# Altium PCB PCB1.pcbdoc (part 3 of 4)
Units mil, origin at the board's own origin, x right, y up, seen from the top; angles counter-clockwise.
Board outline 3346.69 x 4227.01 mil, 4 copper layers (Top Layer, Inner1, Inner2, Bottom Layer); 103 components, 145 nets, 660 pads, 276 vias.
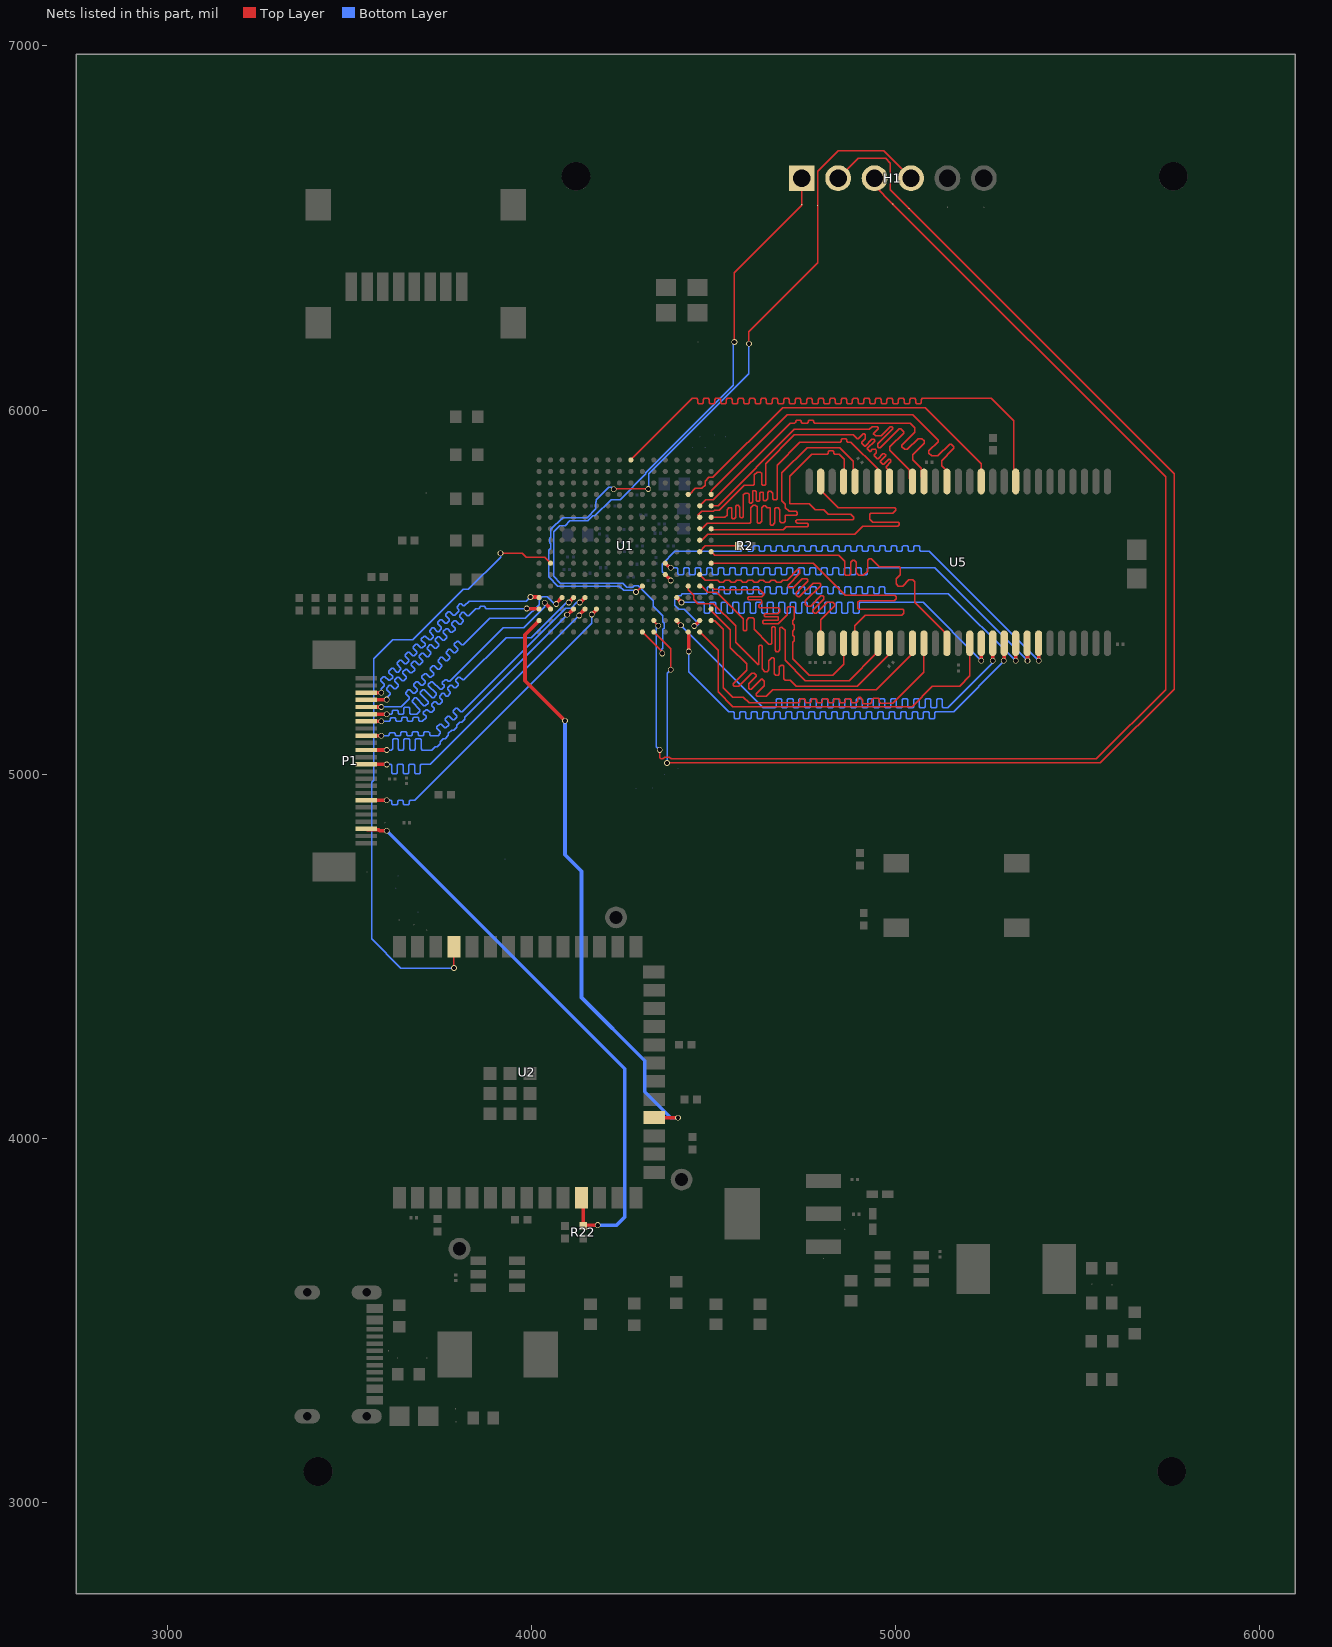
[diagram p5: the nets of this part, all layers, seen from the top]

## Via types
v1: diameter 15.75, hole 11.81, Top Layer to Bottom Layer, 260 vias
v2: diameter 24.02, hole 12.01, Top Layer to Bottom Layer, 16 vias

## Nets (pads, with @x,y where several pads share a name; then routed paths per layer and width w, separated by ;. In a path a pad name is that pad's centre, name@x,y a point inside that pad or via, vN(x,y) a via of type N, cw(c..) or ccw(c..) an arc to the next point about the centre after c; other vN are vias at no path point) (continued)
SD_A12: U1.A9 U5.36 | length 1784.5
  Top Layer w3.94: U1.A9@4272.76,5863.23 4441.54,6032.01 4453.35,6032.01 4456.13,6029.22 4456.13,6019.79 4458.92,6017.01 4469.1,6017.01 4471.88,6019.79 4471.88,6029.22 4474.66,6032.01 4484.85,6032.01 4487.63,6029.22 4487.63,6019.79 4490.41,6017.01 4500.59,6017.01 4503.38,6019.79 4503.38,6029.22 4506.16,6032.01 4516.34,6032.01 4519.12,6029.22 4519.12,6019.79 4521.91,6017.01 4532.09,6017.01 4534.87,6019.79 4534.87,6029.22 4537.66,6032.01 4547.84,6032.01 4550.62,6029.22 4550.62,6019.79 4553.4,6017.01 4563.59,6017.01 4566.37,6019.79 4566.37,6029.22 4569.15,6032.01 4579.33,6032.01 4582.12,6029.22 4582.12,6019.79 4584.9,6017.01 4595.08,6017.01 4597.87,6019.79 4597.87,6029.22 4600.65,6032.01 4610.83,6032.01 4613.61,6029.22 4613.61,6019.79 4616.4,6017.01 4626.58,6017.01 4629.36,6019.79 4629.36,6029.22 4632.15,6032.01 4642.33,6032.01 4645.11,6029.22 4645.11,6019.79 4647.89,6017.01 4658.07,6017.01 4660.86,6019.79 4660.86,6029.22 4663.64,6032.01 4673.82,6032.01 4676.61,6029.22 4676.61,6019.79 4679.39,6017.01 4689.57,6017.01 4692.35,6019.79 4692.35,6029.22 4695.14,6032.01 4705.32,6032.01 4708.1,6029.22 4708.1,6019.79 4710.89,6017.01 4721.07,6017.01 4723.85,6019.79 4723.85,6029.22 4726.63,6032.01 4736.81,6032.01 4739.6,6029.22 4739.6,6019.79 4742.38,6017.01 4752.56,6017.01 4755.35,6019.79 4755.35,6029.22 4758.13,6032.01 4768.31,6032.01 4771.09,6029.22 4771.09,6019.79 4773.88,6017.01 4784.06,6017.01 4786.84,6019.79 4786.84,6029.22 4789.63,6032.01 4799.81,6032.01 4802.59,6029.22 4802.59,6019.79 4805.37,6017.01 4815.55,6017.01 4818.34,6019.79 4818.34,6029.22 4821.12,6032.01 4831.3,6032.01 4834.09,6029.22 4834.09,6019.79 4836.87,6017.01 4847.05,6017.01 4849.83,6019.79 4849.83,6029.22 4852.62,6032.01 4862.8,6032.01 4865.58,6029.22 4865.58,6019.79 4868.37,6017.01 4878.55,6017.01 4881.33,6019.79 4881.33,6029.22 4884.11,6032.01 4894.29,6032.01 4897.08,6029.22 4897.08,6019.79 4899.86,6017.01 4910.04,6017.01 4912.83,6019.79 4912.83,6029.22 4915.61,6032.01 4925.79,6032.01 4928.57,6029.22 4928.57,6019.79 4931.36,6017.01 4941.54,6017.01 4944.32,6019.79 4944.32,6029.22 4947.11,6032.01 4957.29,6032.01 4960.07,6029.22 4960.07,6019.79 4962.85,6017.01 4973.03,6017.01 4975.82,6019.79 4975.82,6029.22 4978.6,6032.01 4988.78,6032.01 4991.57,6029.22 4991.57,6019.79 4994.35,6017.01 5004.53,6017.01 5007.31,6019.79 5007.31,6029.22 5010.1,6032.01 5020.28,6032.01 5023.06,6029.22 5023.06,6019.79 5025.85,6017.01 5036.03,6017.01 5038.81,6019.79 5038.81,6029.22 5041.59,6032.01 5051.77,6032.01 5054.56,6029.22 5054.56,6019.79 5057.34,6017.01 5067.52,6017.01 5070.31,6019.79 5070.31,6029.22 5073.09,6032.01 5262.01,6032.01 5323.81,5970.2 5323.81,5819.81 5324.49,5819.14 5324.49,5809.14 U5.36@5329.49,5804.14
SD_BA0: U1.K12 U5.20 | length 1708.5
  Top Layer w10: U1.K12@4367.25,5579.77 4380.07,5566.94 v1(4381.94,5566.94) ; U5.20@5360.99,5359.88 5362.01,5358.86 v1(5362.01,5312.01)
  Bottom Layer w3.94: v1(4381.94,5566.94) 4399.31,5566.94 4402.09,5564.16 4402.09,5550.16 4404.87,5547.37 4415.05,5547.37 4417.84,5550.16 4417.84,5564.16 4420.62,5566.94 4430.8,5566.94 4433.59,5564.16 4433.59,5550.16 4436.37,5547.37 4446.55,5547.37 4449.33,5550.16 4449.33,5564.16 4452.12,5566.94 4462.3,5566.94 4465.08,5564.16 4465.08,5550.16 4467.87,5547.37 4478.05,5547.37 4480.83,5550.16 4480.83,5564.16 4483.61,5566.94 4493.79,5566.94 4496.58,5564.16 4496.58,5550.16 4499.36,5547.37 4509.54,5547.37 4512.33,5550.16 4512.33,5564.16 4515.11,5566.94 4525.29,5566.94 4528.07,5564.16 4528.07,5550.16 4530.86,5547.37 4541.04,5547.37 4543.82,5550.16 4543.82,5564.16 4546.61,5566.94 4556.79,5566.94 4559.57,5564.16 4559.57,5550.16 4562.35,5547.37 4572.53,5547.37 4575.32,5550.16 4575.32,5564.16 4578.1,5566.94 4588.28,5566.94 4591.07,5564.16 4591.07,5550.16 4593.85,5547.37 4604.03,5547.37 4606.81,5550.16 4606.81,5564.16 4609.6,5566.94 4619.78,5566.94 4622.56,5564.16 4622.56,5550.16 4625.35,5547.37 4635.53,5547.37 4638.31,5550.16 4638.31,5564.16 4641.09,5566.94 4651.27,5566.94 4654.06,5564.16 4654.06,5550.16 4656.84,5547.37 4667.02,5547.37 4669.81,5550.16 4669.81,5564.16 4672.59,5566.94 4682.77,5566.94 4685.55,5564.16 4685.55,5550.16 4688.34,5547.37 4698.52,5547.37 4701.3,5550.16 4701.3,5564.16 4704.09,5566.94 4714.27,5566.94 4717.05,5564.16 4717.05,5550.16 4719.83,5547.37 4730.01,5547.37 4732.8,5550.16 4732.8,5564.16 4735.58,5566.94 4745.76,5566.94 4748.55,5564.16 4748.55,5550.16 4751.33,5547.37 4761.51,5547.37 4764.29,5550.16 4764.29,5564.16 4767.08,5566.94 4777.26,5566.94 4780.04,5564.16 4780.04,5550.16 4782.83,5547.37 4793.01,5547.37 4795.79,5550.16 4795.79,5564.16 4798.57,5566.94 4808.75,5566.94 4811.54,5564.16 4811.54,5550.16 4814.32,5547.37 4824.5,5547.37 4827.29,5550.16 4827.29,5564.16 4830.07,5566.94 4840.25,5566.94 4843.03,5564.16 4843.03,5550.16 4845.82,5547.37 4856,5547.37 4858.78,5550.16 4858.78,5564.16 4861.57,5566.94 4871.75,5566.94 4874.53,5564.16 4874.53,5550.16 4877.31,5547.37 4887.49,5547.37 4890.28,5550.16 4890.28,5564.16 4893.06,5566.94 4903.24,5566.94 4906.03,5564.16 4906.03,5550.16 4908.81,5547.37 4918.99,5547.37 4921.77,5550.16 4921.77,5564.16 4924.56,5566.94 5107.07,5566.94 v1(5362.01,5312.01)
SD_BA1: U1.L12 U5.21 | length 1673.6
  Top Layer w10: U1.L12@4367.25,5548.27 4382.01,5533.51 v1(4382.01,5532.01) ; v1(5392.48,5312.01) U5.21@5392.48,5359.88
  Bottom Layer w3.94: v1(4382.01,5532.01) 4358.24,5555.77 4358.24,5576.76 4393.49,5612.01 4574.9,5612.01 4577.68,5614.79 4577.68,5624.22 4580.46,5627.01 4590.64,5627.01 4593.43,5624.22 4593.43,5614.79 4596.21,5612.01 4606.39,5612.01 4609.18,5614.79 4609.18,5624.22 4611.96,5627.01 4622.14,5627.01 4624.92,5624.22 4624.92,5614.79 4627.71,5612.01 4637.89,5612.01 4640.67,5614.79 4640.67,5624.22 4643.46,5627.01 4653.64,5627.01 4656.42,5624.22 4656.42,5614.79 4659.2,5612.01 4669.38,5612.01 4672.17,5614.79 4672.17,5624.22 4674.95,5627.01 4685.13,5627.01 4687.92,5624.22 4687.92,5614.79 4690.7,5612.01 4700.88,5612.01 4703.66,5614.79 4703.66,5624.22 4706.45,5627.01 4716.63,5627.01 4719.41,5624.22 4719.41,5614.79 4722.2,5612.01 4732.38,5612.01 4735.16,5614.79 4735.16,5624.22 4737.94,5627.01 4748.12,5627.01 4750.91,5624.22 4750.91,5614.79 4753.69,5612.01 4763.87,5612.01 4766.66,5614.79 4766.66,5624.22 4769.44,5627.01 4779.62,5627.01 4782.4,5624.22 4782.4,5614.79 4785.19,5612.01 4795.37,5612.01 4798.15,5614.79 4798.15,5624.22 4800.94,5627.01 4811.12,5627.01 4813.9,5624.22 4813.9,5614.79 4816.68,5612.01 4826.86,5612.01 4829.65,5614.79 4829.65,5624.22 4832.43,5627.01 4842.61,5627.01 4845.4,5624.22 4845.4,5614.79 4848.18,5612.01 4858.36,5612.01 4861.14,5614.79 4861.14,5624.22 4863.93,5627.01 4874.11,5627.01 4876.89,5624.22 4876.89,5614.79 4879.68,5612.01 4889.86,5612.01 4892.64,5614.79 4892.64,5624.22 4895.42,5627.01 4905.6,5627.01 4908.39,5624.22 4908.39,5614.79 4911.17,5612.01 4921.35,5612.01 4924.14,5614.79 4924.14,5624.22 4926.92,5627.01 4937.1,5627.01 4939.88,5624.22 4939.88,5614.79 4942.67,5612.01 4952.85,5612.01 4955.63,5614.79 4955.63,5624.22 4958.42,5627.01 4968.6,5627.01 4971.38,5624.22 4971.38,5614.79 4974.16,5612.01 4984.34,5612.01 4987.13,5614.79 4987.13,5624.22 4989.91,5627.01 5000.09,5627.01 5002.88,5624.22 5002.88,5614.79 5005.66,5612.01 5015.84,5612.01 5018.62,5614.79 5018.62,5624.22 5021.41,5627.01 5031.59,5627.01 5034.37,5624.22 5034.37,5614.79 5037.16,5612.01 5047.34,5612.01 5050.12,5614.79 5050.12,5624.22 5052.9,5627.01 5063.08,5627.01 5065.87,5624.22 5065.87,5614.79 5068.65,5612.01 5092.48,5612.01 v1(5392.48,5312.01)
SD_CAS_N: U1.R13 U5.17 | length 1697.4
  Top Layer w10: U1.R13@4398.74,5422.29 4398.74,5420.41 v1(4410.1,5409.05) ; v1(5266.5,5312.01) U5.17@5266.5,5359.88
  Bottom Layer w3.94: v1(4410.1,5409.05) 4636.23,5182.91 4668.5,5182.91 4671.29,5185.7 4671.29,5204.22 4674.07,5207.01 4684.25,5207.01 4687.03,5204.22 4687.03,5185.7 4689.82,5182.91 4700,5182.91 4702.78,5185.7 4702.78,5204.22 4705.57,5207.01 4715.75,5207.01 4718.53,5204.22 4718.53,5185.7 4721.31,5182.91 4731.49,5182.91 4734.28,5185.7 4734.28,5204.22 4737.06,5207.01 4747.24,5207.01 4750.03,5204.22 4750.03,5185.7 4752.81,5182.91 4762.99,5182.91 4765.77,5185.7 4765.77,5204.22 4768.56,5207.01 4778.74,5207.01 4781.52,5204.22 4781.52,5185.7 4784.31,5182.91 4794.49,5182.91 4797.27,5185.7 4797.27,5204.22 4800.05,5207.01 4810.23,5207.01 4813.02,5204.22 4813.02,5185.7 4815.8,5182.91 4825.98,5182.91 4828.77,5185.7 4828.77,5204.22 4831.55,5207.01 4841.73,5207.01 4844.51,5204.22 4844.51,5185.7 4847.3,5182.91 4857.48,5182.91 4860.26,5185.7 4860.26,5204.22 4863.05,5207.01 4873.23,5207.01 4876.01,5204.22 4876.01,5185.7 4878.79,5182.91 4888.97,5182.91 4891.76,5185.7 4891.76,5204.22 4894.54,5207.01 4904.72,5207.01 4907.51,5204.22 4907.51,5185.7 4910.29,5182.91 4920.47,5182.91 4923.25,5185.7 4923.25,5204.22 4926.04,5207.01 4936.22,5207.01 4939,5204.22 4939,5185.7 4941.79,5182.91 4951.97,5182.91 4954.75,5185.7 4954.75,5204.22 4957.53,5207.01 4967.71,5207.01 4970.5,5204.22 4970.5,5185.7 4973.28,5182.91 4983.46,5182.91 4986.25,5185.7 4986.25,5204.22 4989.03,5207.01 4999.21,5207.01 5001.99,5204.22 5001.99,5185.7 5004.78,5182.91 5014.96,5182.91 5017.74,5185.7 5017.74,5204.22 5020.53,5207.01 5030.71,5207.01 5033.49,5204.22 5033.49,5185.7 5036.27,5182.91 5046.45,5182.91 5049.24,5185.7 5049.24,5204.22 5052.02,5207.01 5062.2,5207.01 5064.99,5204.22 5064.99,5185.7 5067.77,5182.91 5077.95,5182.91 5080.73,5185.7 5080.73,5204.22 5083.52,5207.01 5093.7,5207.01 5096.48,5204.22 5096.48,5185.7 5099.27,5182.91 5109.45,5182.91 5112.23,5185.7 5112.23,5204.22 5115.01,5207.01 5125.19,5207.01 5127.98,5204.22 5127.98,5185.7 5130.76,5182.91 5142.57,5182.91 5266.5,5306.84 v1(5266.5,5312.01)
SD_CLK: R2.2 U1.J15 | length 114.8
  Top Layer w3.94: U1.J15@4461.73,5611.26 4477.48,5627.01 R2.2@4569.97,5627.01
SD_CS_N: U1.R15 U5.19 | length 1693.9
  Top Layer w10: v1(4447.01,5407.01) 4461.73,5421.73 U1.R15@4461.73,5422.29 ; v1(5329.49,5312.01) U5.19@5329.49,5359.88
  Bottom Layer w3.94: v1(4447.01,5407.01) 4452.01,5407.01 4458.67,5413.67 4419.2,5453.15 4404.2,5453.15 4393.15,5464.2 4393.15,5479.82 4404.2,5490.87 4409.2,5490.87 4414.2,5495.87 4479.56,5495.87 4482.34,5498.65 4482.34,5511.62 4485.12,5514.41 4495.3,5514.41 4498.09,5511.62 4498.09,5498.65 4500.87,5495.87 4511.05,5495.87 4513.84,5498.65 4513.84,5511.62 4516.62,5514.41 4526.8,5514.41 4529.58,5511.62 4529.58,5498.65 4532.37,5495.87 4542.55,5495.87 4545.33,5498.65 4545.33,5511.62 4548.12,5514.41 4558.3,5514.41 4561.08,5511.62 4561.08,5498.65 4563.86,5495.87 4574.04,5495.87 4576.83,5498.65 4576.83,5511.62 4579.61,5514.41 4589.79,5514.41 4592.58,5511.62 4592.58,5498.65 4595.36,5495.87 4605.54,5495.87 4608.32,5498.65 4608.32,5511.62 4611.11,5514.41 4621.29,5514.41 4624.07,5511.62 4624.07,5498.65 4626.86,5495.87 4637.04,5495.87 4639.82,5498.65 4639.82,5511.62 4642.6,5514.41 4652.78,5514.41 4655.57,5511.62 4655.57,5498.65 4658.35,5495.87 4668.53,5495.87 4671.32,5498.65 4671.32,5511.62 4674.1,5514.41 4684.28,5514.41 4687.06,5511.62 4687.06,5498.65 4689.85,5495.87 4700.03,5495.87 4702.81,5498.65 4702.81,5511.62 4705.6,5514.41 4715.78,5514.41 4718.56,5511.62 4718.56,5498.65 4721.34,5495.87 4731.52,5495.87 4734.31,5498.65 4734.31,5511.62 4737.09,5514.41 4747.27,5514.41 4750.06,5511.62 4750.06,5498.65 4752.84,5495.87 4763.02,5495.87 4765.8,5498.65 4765.8,5511.62 4768.59,5514.41 4778.77,5514.41 4781.55,5511.62 4781.55,5498.65 4784.34,5495.87 4794.52,5495.87 4797.3,5498.65 4797.3,5511.62 4800.08,5514.41 4810.26,5514.41 4813.05,5511.62 4813.05,5498.65 4815.83,5495.87 4826.01,5495.87 4828.8,5498.65 4828.8,5511.62 4831.58,5514.41 4841.76,5514.41 4844.54,5511.62 4844.54,5498.65 4847.33,5495.87 4857.51,5495.87 4860.29,5498.65 4860.29,5511.62 4863.08,5514.41 4873.26,5514.41 4876.04,5511.62 4876.04,5498.65 4878.82,5495.87 4889,5495.87 4891.79,5498.65 4891.79,5511.62 4894.57,5514.41 4904.75,5514.41 4907.54,5511.62 4907.54,5498.65 4910.32,5495.87 4920.5,5495.87 4923.28,5498.65 4923.28,5511.62 4926.07,5514.41 4936.25,5514.41 4939.03,5511.62 4939.03,5498.65 4941.82,5495.87 4952,5495.87 4954.78,5498.65 4954.78,5511.62 4957.56,5514.41 4967.74,5514.41 4970.53,5511.62 4970.53,5498.65 4973.31,5495.87 5144.82,5495.87 5323.68,5317.01 5324.49,5317.01 v1(5329.49,5312.01)
SD_DQ0: U1.L15 U5.2 | length 983.7
  Top Layer w3.94: U1.L15@4461.73,5548.27 4476.77,5533.23 4510.9,5533.23 4513.68,5530.44 4513.68,5529.79 4516.47,5527.01 4526.65,5527.01 4529.43,5529.79 4529.43,5530.44 4532.22,5533.23 4542.4,5533.23 4545.18,5530.44 4545.18,5529.79 4547.96,5527.01 4558.14,5527.01 4560.93,5529.79 4560.93,5530.44 4563.71,5533.23 4573.89,5533.23 4576.68,5530.44 4576.68,5529.79 4579.46,5527.01 4589.64,5527.01 4592.42,5529.79 4592.42,5530.44 4595.21,5533.23 4605.39,5533.23 4608.17,5530.44 4608.17,5529.79 4610.96,5527.01 4621.14,5527.01 4623.92,5529.79 4623.92,5530.44 4626.7,5533.23 4636.88,5533.23 4639.67,5530.44 4639.67,5529.79 4642.45,5527.01 4652.63,5527.01 4655.42,5529.79 4655.42,5530.44 4658.2,5533.23 4668.38,5533.23 4671.16,5530.44 4671.16,5529.79 4673.95,5527.01 4684.13,5527.01 4686.91,5529.79 4686.91,5530.44 4689.7,5533.23 4701.51,5533.23 4731.44,5563.16 4735.85,5563.16 4737.01,5562.01 4737.01,5552.01 4704.61,5519.61 4704.61,5514.41 4707.01,5512.01 4718.85,5512.01 4743.85,5537.01 4756.04,5537.01 4758.82,5534.22 4758.82,5530.29 4727.01,5498.47 4727.01,5492.01 4732.01,5487.01 4735.57,5487.01 4773.36,5524.79 4791.27,5524.79 4794.06,5522.01 4794.06,5518.3 4752.01,5476.25 4752.01,5467.01 4757.01,5462.01 4767.01,5462.01 4794.79,5489.79 4799.22,5489.79 4802.01,5487.01 4802.01,5481.01 4772.01,5451.01 4772.01,5447.01 4777.01,5442.01 4782.01,5442.01 4812.01,5472.01 4827.67,5472.01 4832.42,5467.26 4832.42,5463.32 4794.06,5424.96 U5.2@4794.06,5364.88
SD_DQ1: U1.M16 U5.4 | length 983
  Top Layer w3.94: U1.M16@4493.23,5516.77 4501.73,5508.27 4511.99,5508.27 4513.49,5506.77 4627.25,5506.77 4639.11,5494.91 4632.36,5488.16 4597.01,5488.16 4594.22,5485.37 4594.22,5481.44 4597.01,5478.65 4630.36,5478.65 4632.01,5477.01 4632.01,5471.55 4624.22,5463.77 4624.22,5459.83 4627.01,5457.05 4676.97,5457.05 4681.19,5452.83 4681.19,5446.19 4676.19,5441.19 4642.01,5441.19 4639.45,5438.63 4639.45,5435.02 4642.01,5432.46 4676.97,5432.46 4676.97,5423.25 4676.29,5422.57 4637.01,5422.57 4634.22,5419.79 4634.22,5415.85 4637.01,5413.07 4676.97,5413.07 4702.01,5438.11 4702.01,5457.01 4704.79,5459.79 4719.22,5459.79 4722.01,5457.01 4722.01,5427.01 4717.01,5422.01 4717.01,5413.98 4721.74,5409.25 4721.74,5398.23 4717.01,5393.5 4717.01,5382.48 4721.74,5377.75 4721.74,5366.73 4717.01,5362.01 4717.01,5317.01 4762.01,5272.01 4827.01,5272.01 4857.05,5302.05 U5.4@4857.05,5364.88
SD_DQ2: U1.K16 U5.5 | length 1006.3
  Top Layer w3.94: U1.K16@4493.23,5579.77 4774.25,5579.77 4862.01,5492.01 4997.01,5492.01 5002.01,5487.01 5002.01,5482.01 4996.36,5476.36 4900.65,5476.36 4896.3,5472.01 4896.3,5456.08 4898.65,5453.73 5019.22,5453.73 5022.01,5450.94 5022.01,5442.01 5017.05,5437.05 4917.05,5437.05 4887.87,5407.87 4887.87,5375.55 4888.55,5374.88 U5.5@4888.55,5364.88
SD_DQ3: U1.M15 U5.7 | length 978.3
  Top Layer w3.94: U1.M15@4461.73,5516.77 4464.87,5516.77 4465.45,5516.18 4467.31,5516.18 4483.18,5500.32 4508.7,5500.32 4581.4,5427.61 4581.4,5397.01 4584.19,5394.22 4588.12,5394.22 4590.91,5397.01 4590.91,5423.65 4597.01,5429.75 4607.01,5429.75 4610.94,5425.81 4610.94,5398.07 4652.01,5357.01 4657.01,5357.01 4659.28,5359.28 4659.28,5402.01 4662.07,5404.79 4666.01,5404.79 4668.79,5402.01 4668.79,5340.23 4672.01,5337.01 4677.01,5337.01 4681.88,5341.88 4681.88,5402.01 4684.2,5404.33 4687.48,5404.33 4696.23,5395.57 4696.23,5312.78 4752.01,5257.01 4872.21,5257.01 4945.86,5330.66 4945.86,5354.2 4946.54,5354.88 4946.54,5359.88 U5.7@4951.54,5364.88
SD_DQ4: U1.M14 U5.8 | length 1016.4
  Top Layer w3.94: U1.M14@4430.24,5516.77 4430.24,5506.55 4445.28,5491.51 4445.28,5480.46 4456.92,5468.82 4499.46,5468.82 4560.96,5407.32 4560.96,5362.01 4622.28,5300.68 4623.54,5301.94 4623.54,5352.01 4626.33,5354.79 4630.26,5354.79 4633.05,5352.01 4633.05,5289.92 4640.96,5282.01 4647.01,5282.01 4651.69,5286.69 4651.69,5311.2 4660.29,5319.79 4664.22,5319.79 4667.01,5317.01 4667.01,5275.94 4670.94,5272.01 4677.01,5272.01 4680.64,5275.64 4680.64,5295.14 4685.29,5299.79 4689.22,5299.79 4692.01,5297.01 4692.01,5262.89 4697.01,5257.89 4710.39,5257.89 4726.27,5242.01 4894.42,5242.01 4989.21,5336.79 4989.21,5358.69 U5.8@4983.03,5364.88
SD_DQ5: U1.P16 U5.10 | length 1006.4
  Top Layer w3.94: U1.P16@4493.23,5453.78 4493.23,5449.49 4546.2,5396.52 4546.2,5347.82 4590.82,5303.2 4590.82,5285.32 4554.22,5248.73 4554.22,5244.79 4557.01,5242.01 4569.61,5242.01 4604.61,5277.01 4612.01,5277.01 4617.01,5272.01 4617.01,5269.41 4596.51,5248.92 4596.51,5236.51 4599.3,5233.73 4603.23,5233.73 4631.76,5262.25 4638.41,5255.61 4638.41,5242.91 4616.73,5221.23 4616.73,5217.29 4619.51,5214.5 4644.5,5214.5 4662.01,5232.01 4946.7,5232.01 5046.03,5331.33 U5.10@5046.03,5364.88
SD_DQ6: U1.R16 U5.11 | length 990.6
  Top Layer w3.94: U1.R16@4493.23,5422.29 4503.62,5422.29 4527.01,5398.9 4527.01,5237.01 4551.87,5212.15 4581.87,5212.15 4597.64,5196.37 4733.13,5196.37 4735.92,5199.16 4735.92,5204.22 4738.7,5207.01 4748.88,5207.01 4751.67,5204.22 4751.67,5199.16 4754.45,5196.37 4764.63,5196.37 4767.41,5199.16 4767.41,5204.22 4770.2,5207.01 4780.38,5207.01 4783.16,5204.22 4783.16,5199.16 4785.95,5196.37 4796.13,5196.37 4798.91,5199.16 4798.91,5204.22 4801.69,5207.01 4811.88,5207.01 4814.66,5204.22 4814.66,5199.16 4817.44,5196.37 4827.62,5196.37 4830.41,5199.16 4830.41,5204.22 4833.19,5207.01 4843.37,5207.01 4846.15,5204.22 4846.15,5199.16 4848.94,5196.37 4859.12,5196.37 4861.9,5199.16 4861.9,5204.22 4864.69,5207.01 4874.87,5207.01 4877.65,5204.22 4877.65,5199.16 4880.43,5196.37 4891.35,5196.37 4895.29,5200.31 4895.29,5209.22 4898.07,5212.01 4902.01,5212.01 4910.13,5203.89 4910.13,5194.01 4930.29,5194.01 4934.22,5197.94 4934.22,5204.22 4939.22,5209.22 4952.01,5209.22 4954.79,5206.44 4954.79,5199.12 4958.73,5195.18 4991.45,5195.18 5077.01,5280.73 U5.11@5077.01,5345
SD_DQ7: U1.J16 U5.13 | length 993.5
  Top Layer w3.94: U1.J16@4493.23,5611.26 4502.48,5602.01 4843.09,5602.01 4860.29,5584.79 4860.29,5549.29 4863.07,5546.51 4872.57,5546.51 4876.51,5550.45 4876.51,5582.01 4881.88,5587.38 4886.64,5587.38 4892.08,5581.94 4892.08,5553 4898.57,5546.51 4911.51,5546.51 4922.64,5557.64 4922.64,5587.64 4927.01,5592.01 4932.64,5592.01 4955.01,5569.65 4955.15,5569.79 5009.22,5569.79 5012.01,5567.01 5012.01,5547.37 5002.01,5537.37 5002.01,5522.64 5007.64,5517.01 5019.32,5517.01 5036.47,5534.16 5047.01,5534.16 5052.1,5529.06 5052.1,5472.58 ; 5052.09,5472.57 5140.51,5384.14 U5.13@5140.51,5364.88
SD_DQ8: U1.D16 U5.42 | length 993.1
  Top Layer w3.94: U1.D16@4493.23,5768.74 4493.23,5778.74 4701.5,5987.01 5047.01,5987.01 5117.01,5917.01 5117.01,5913.82 5091.19,5888 5091.19,5882.01 5098.57,5874.63 5115.69,5874.63 5148.07,5907.01 5152.01,5907.01 5159.79,5899.22 5159.79,5894.79 5157.01,5892.01 5156.77,5892.01 5126.19,5861.43 5126.19,5847.01 5135.51,5837.69 5135.51,5814.14 U5.42@5140.51,5809.14
SD_DQ9: U1.E15 U5.44 | length 985.5
  Top Layer w3.94: U1.E15@4461.73,5737.25 4478.18,5753.7 4499.46,5753.7 4710.27,5964.51 4722.08,5964.51 4724.86,5967.29 4724.86,5969.22 4727.65,5972.01 4737.83,5972.01 4740.61,5969.22 4740.61,5967.29 4743.39,5964.51 4756.98,5964.51 4759.77,5967.29 4759.77,5969.22 4762.55,5972.01 4772.73,5972.01 4775.51,5969.22 4775.51,5967.29 4778.3,5964.51 5039.51,5964.51 5052.01,5952.01 5052.01,5938.66 5017.01,5903.66 5017.01,5899.4 5024.4,5892.01 5032.01,5892.01 5062.01,5922.01 5072.01,5922.01 5078.68,5915.34 5078.68,5909.77 5047.01,5878.1 5047.01,5863.2 5070.02,5840.19 5070.02,5816.64 U5.44@5077.52,5809.14
SD_DQ10: U1.E16 U5.45 | length 982.3
  Top Layer w3.94: U1.E16@4493.23,5737.25 4512.25,5737.25 4722.01,5947.01 4927.41,5947.01 4935.2,5954.79 4949.22,5954.79 4952.01,5952.01 4952.01,5948.62 4938.9,5935.52 4945.13,5929.29 4959.79,5929.29 4985.29,5954.79 4989.22,5954.79 4992.01,5952.01 4992.01,5949.39 4950.82,5908.2 4950.82,5899.26 4953.6,5896.48 4957.54,5896.48 5010.04,5948.98 5013.98,5948.98 5022.01,5940.94 5022.01,5937.01 4984.18,5899.18 4984.18,5890.24 5032.32,5842.1 5032.32,5841.9 5037.6,5836.62 5037.6,5813.08 5041.54,5809.14 U5.45@5046.03,5809.14
SD_DQ11: U1.F15 U5.47 | length 987.3
  Top Layer w3.94: U1.F15@4461.73,5705.75 4456.73,5710.75 4456.73,5711.73 4467.21,5722.21 4499.46,5722.21 4503.04,5725.79 4515.79,5725.79 4584.22,5794.22 4609.22,5794.22 4612.01,5797.01 4612.01,5822.01 4620.02,5830.02 4628.07,5830.02 4632.01,5826.08 4632.01,5797.01 4634.79,5794.22 4640.67,5794.22 4643.45,5797.01 4643.45,5853.45 4722.01,5932.01 4883.71,5932.01 4893.94,5921.78 4897.27,5921.78 4910.29,5934.79 4914.22,5934.79 4917.01,5932.01 4917.01,5922.01 4907.01,5912.01 4907.01,5908.71 4914.32,5901.4 4916.4,5901.4 4934.79,5919.79 4939.22,5919.79 4942.01,5917.01 4942.01,5915.26 4922.01,5895.26 4922.01,5893.71 4929.86,5885.86 4936.02,5892.01 4944.52,5892.01 4947.01,5889.52 4947.01,5883.24 4940.78,5877.01 4940.78,5874.94 4948.71,5867.01 4952.01,5867.01 4964.79,5879.79 4969.22,5879.79 4972.01,5877.01 4972.01,5875.09 4957.01,5860.09 4957.01,5858.71 4964.69,5851.03 4966.52,5851.03 4980.29,5864.79 4984.22,5864.79 4987.01,5862.01 4987.01,5858.14 4973.71,5844.84 4973.71,5842.01 4983.03,5832.69 U5.47@4983.03,5809.14
SD_DQ12: U1.F16 U5.48 | length 986.3
  Top Layer w3.94: U1.F16@4493.23,5705.75 4530.75,5705.75 4537.01,5712.01 4537.01,5727.01 4542.01,5732.01 4548.57,5732.01 4550.29,5730.29 4550.29,5704.79 4553.07,5702.01 4557.01,5702.01 4561.28,5706.28 4561.28,5736.28 4563.55,5738.55 4567.01,5738.55 4572.33,5733.23 4572.33,5707.18 4575.29,5704.22 4579.22,5704.22 4582.01,5707.01 4582.01,5767.01 4587.01,5772.01 4594.35,5772.01 4597.5,5768.85 4597.5,5747.01 4600.29,5744.22 4602.98,5744.22 4607.01,5748.25 4607.01,5776.83 4609.47,5779.3 4614.72,5779.3 4617.5,5776.51 4617.5,5752.01 4620.29,5749.22 4624.22,5749.22 4627.01,5752.01 4627.01,5772.01 4629.54,5774.54 4634.48,5774.54 4635.87,5773.15 4635.87,5754.21 4638.65,5751.43 4642.59,5751.43 4648.17,5757.01 4648.17,5773.17 4652.01,5777.01 4657.01,5777.01 4662.01,5772.01 4662.01,5757.01 4664.79,5754.22 4671.43,5754.22 4674.22,5757.01 4674.22,5849.22 4737.01,5912.01 4847.58,5912.01 4850.37,5914.79 4850.37,5919.22 4853.15,5922.01 4863.33,5922.01 4866.12,5919.22 4866.12,5914.79 4868.9,5912.01 4877.01,5912.01 4949.23,5839.78 4949.23,5813.08 4951.54,5810.77 U5.48@4951.54,5809.14
SD_DQ13: U1.G15 U5.50 | length 986.5
  Top Layer w3.94: U1.G15@4461.73,5674.25 4467.29,5674.25 4482.33,5689.29 4599.29,5689.29 4602.01,5692.01 4602.01,5732.01 4609.22,5739.22 4614.79,5739.22 4619.79,5734.22 4619.79,5692.01 4622.58,5689.22 4626.51,5689.22 4632.01,5694.72 4632.01,5732.01 4637.01,5737.01 4642.01,5737.01 4647.01,5732.01 4655.53,5732.01 4655.53,5687.01 4658.31,5684.22 4662.25,5684.22 4668.52,5690.5 4668.52,5729.78 4670.75,5732.01 4677.01,5732.01 4682.01,5727.01 4682.01,5694.88 4685.94,5690.94 4693.07,5690.94 4697.01,5694.88 4697.01,5710.37 4698.65,5712.01 4727.01,5712.01 4729.79,5714.79 4729.79,5718.73 4726.7,5721.82 4707.2,5721.82 4697.01,5732.01 4697.01,5741.51 4687.47,5751.05 4687.47,5827.7 4756.77,5897.01 4847.01,5897.01 4883.88,5860.13 4883.88,5813.8 U5.50@4888.55,5809.14
SD_DQ14: U1.G16 U5.51 | length 983.1
  Top Layer w3.94: U1.G16@4493.23,5674.25 4495.73,5671.75 4691.75,5671.75 4699.37,5679.37 4757.01,5679.37 4759.79,5682.15 4759.79,5686.09 4757.01,5688.88 4730.14,5688.88 4725.7,5693.32 4725.7,5695.7 4729.44,5699.44 4882.01,5699.44 4884.79,5702.22 4884.79,5706.16 4876.16,5714.79 4815.29,5714.79 4803.07,5727.01 4778.52,5727.01 4762.01,5743.52 4708.88,5743.52 4708.88,5818.88 4769.51,5879.51 4811.38,5879.51 4814.16,5882.29 4814.16,5885.2 4816.95,5887.98 4827.13,5887.98 4829.91,5885.2 4829.91,5882.29 4832.7,5879.51 4844.51,5879.51 4858.87,5865.14 4858.87,5822.31 U5.51@4859.55,5821.64
SD_DQ15: U1.H15 U5.53 | length 996.9
  Top Layer w3.94: U1.H15@4461.73,5642.76 4466.73,5642.76 4483.18,5659.21 4888.15,5659.21 4910.09,5681.15 5005.65,5681.15 5009.79,5685.29 5009.79,5689.22 5007.01,5692.01 4937.01,5692.01 4929.22,5699.79 4929.22,5714.22 4932.01,5717.01 4991.51,5717.01 4999.79,5725.29 4999.79,5729.22 4997.01,5732.01 4842.01,5732.01 4799.06,5774.96 U5.53@4799.06,5804.14
SD_DQM0: U1.T15 U5.15 | length 1017.6
  Top Layer w3.94: U1.T15@4461.73,5390.79 4512.01,5340.5 4512.01,5227.01 4552.88,5186.13 5044.81,5186.13 5100.69,5242.01 5175.45,5242.01 5203.51,5270.07 U5.15@5203.51,5359.88
SD_DQM1: U1.D14 U5.39 | length 1020
  Top Layer w3.94: U1.D14@4430.24,5768.74 4433.74,5768.74 4450.2,5785.2 4467.96,5785.2 4476.77,5794.01 4476.77,5805.05 4487,5815.28 4498.05,5815.28 4689.78,6007.01 5081.39,6007.01 5235.34,5853.06 5235.34,5814.14 U5.39@5230.34,5809.14
SD_RAS_N: U1.T14 U5.18 | length 1722.8
  Top Layer w10: v1(4432.01,5337.01) U1.T14@4432.01,5384.25 ; v1(5297.01,5312.01) 5297.99,5312.99 U5.18@5297.99,5359.88
  Bottom Layer w3.94: v1(4432.01,5337.01) 4432.01,5282.01 4542.01,5172.01 4553.82,5172.01 4556.6,5169.22 4556.6,5154.79 4559.39,5152.01 4569.57,5152.01 4572.35,5154.79 4572.35,5169.22 4575.13,5172.01 4585.31,5172.01 4588.1,5169.22 4588.1,5154.79 4590.88,5152.01 4601.06,5152.01 4603.85,5154.79 4603.85,5169.22 4606.63,5172.01 4616.81,5172.01 4619.59,5169.22 4619.59,5154.79 4622.38,5152.01 4632.56,5152.01 4635.34,5154.79 4635.34,5169.22 4638.13,5172.01 4648.31,5172.01 4651.09,5169.22 4651.09,5154.79 4653.87,5152.01 4664.06,5152.01 4666.84,5154.79 4666.84,5169.22 4669.62,5172.01 4679.8,5172.01 4682.59,5169.22 4682.59,5154.79 4685.37,5152.01 4695.55,5152.01 4698.34,5154.79 4698.34,5169.22 4701.12,5172.01 4711.3,5172.01 4714.08,5169.22 4714.08,5154.79 4716.87,5152.01 4727.05,5152.01 4729.83,5154.79 4729.83,5169.22 4732.61,5172.01 4742.8,5172.01 4745.58,5169.22 4745.58,5154.79 4748.36,5152.01 4758.54,5152.01 4761.33,5154.79 4761.33,5169.22 4764.11,5172.01 4774.29,5172.01 4777.08,5169.22 4777.08,5154.79 4779.86,5152.01 4790.04,5152.01 4792.82,5154.79 4792.82,5169.22 4795.61,5172.01 4805.79,5172.01 4808.57,5169.22 4808.57,5154.79 4811.36,5152.01 4821.54,5152.01 4824.32,5154.79 4824.32,5169.22 4827.1,5172.01 4837.28,5172.01 4840.07,5169.22 4840.07,5154.79 4842.85,5152.01 4853.03,5152.01 4855.82,5154.79 4855.82,5169.22 4858.6,5172.01 4868.78,5172.01 4871.56,5169.22 4871.56,5154.79 4874.35,5152.01 4884.53,5152.01 4887.31,5154.79 4887.31,5169.22 4890.1,5172.01 4900.28,5172.01 4903.06,5169.22 4903.06,5154.79 4905.84,5152.01 4916.02,5152.01 4918.81,5154.79 4918.81,5169.22 4921.59,5172.01 4931.77,5172.01 4934.56,5169.22 4934.56,5154.79 4937.34,5152.01 4947.52,5152.01 4950.3,5154.79 4950.3,5169.22 4953.09,5172.01 4963.27,5172.01 4966.05,5169.22 4966.05,5154.79 4968.84,5152.01 4979.02,5152.01 4981.8,5154.79 4981.8,5169.22 4984.58,5172.01 4994.76,5172.01 4997.55,5169.22 4997.55,5154.79 5000.33,5152.01 5010.51,5152.01 5013.3,5154.79 5013.3,5169.22 5016.08,5172.01 5026.26,5172.01 5029.04,5169.22 5029.04,5154.79 5031.83,5152.01 5042.01,5152.01 5044.79,5154.79 5044.79,5169.22 5047.58,5172.01 5057.76,5172.01 5060.54,5169.22 5060.54,5154.79 5063.32,5152.01 5073.5,5152.01 5076.29,5154.79 5076.29,5169.22 5079.07,5172.01 5089.25,5172.01 5092.04,5169.22 5092.04,5154.79 5094.82,5152.01 5105,5152.01 5107.78,5154.79 5107.78,5169.22 5110.57,5172.01 5158.88,5172.01 5297.01,5310.14 v1(5297.01,5312.01)
SD_WE_N: U1.N13 U5.16 | length 1704.6
  Top Layer w10: U1.N13@4398.74,5485.28 v1(4412.01,5472.01) ; v1(5235,5312.01) U5.16@5235,5359.88
  Bottom Layer w3.94: v1(4412.01,5472.01) 4471.39,5472.01 4474.17,5469.22 4474.17,5444.79 4476.95,5442.01 4487.13,5442.01 4489.92,5444.79 4489.92,5469.22 4492.7,5472.01 4502.88,5472.01 4505.67,5469.22 4505.67,5444.79 4508.45,5442.01 4518.63,5442.01 4521.41,5444.79 4521.41,5469.22 4524.2,5472.01 4534.38,5472.01 4537.16,5469.22 4537.16,5444.79 4539.95,5442.01 4550.13,5442.01 4552.91,5444.79 4552.91,5469.22 4555.69,5472.01 4565.87,5472.01 4568.66,5469.22 4568.66,5444.79 4571.44,5442.01 4581.62,5442.01 4584.41,5444.79 4584.41,5469.22 4587.19,5472.01 4597.37,5472.01 4600.15,5469.22 4600.15,5444.79 4602.94,5442.01 4613.12,5442.01 4615.9,5444.79 4615.9,5469.22 4618.69,5472.01 4628.87,5472.01 4631.65,5469.22 4631.65,5444.79 4634.43,5442.01 4644.61,5442.01 4647.4,5444.79 4647.4,5469.22 4650.18,5472.01 4660.36,5472.01 4663.15,5469.22 4663.15,5444.79 4665.93,5442.01 4676.11,5442.01 4678.89,5444.79 4678.89,5469.22 4681.68,5472.01 4691.86,5472.01 4694.64,5469.22 4694.64,5444.79 4697.43,5442.01 4707.61,5442.01 4710.39,5444.79 4710.39,5469.22 4713.17,5472.01 4723.36,5472.01 4726.14,5469.22 4726.14,5444.79 4728.92,5442.01 4739.1,5442.01 4741.89,5444.79 4741.89,5469.22 4744.67,5472.01 4754.85,5472.01 4757.64,5469.22 4757.64,5444.79 4760.42,5442.01 4770.6,5442.01 4773.38,5444.79 4773.38,5469.22 4776.17,5472.01 4786.35,5472.01 4789.13,5469.22 4789.13,5444.79 4791.91,5442.01 4802.1,5442.01 4804.88,5444.79 4804.88,5469.22 4807.66,5472.01 4817.84,5472.01 4820.63,5469.22 4820.63,5444.79 4823.41,5442.01 4833.59,5442.01 4836.38,5444.79 4836.38,5469.22 4839.16,5472.01 4849.34,5472.01 4852.12,5469.22 4852.12,5444.79 4854.91,5442.01 4865.09,5442.01 4867.87,5444.79 4867.87,5469.22 4870.66,5472.01 4880.84,5472.01 4883.62,5469.22 4883.62,5444.79 4886.4,5442.01 4896.58,5442.01 4899.37,5444.79 4899.37,5469.22 4902.15,5472.01 5075,5472.01 v1(5235,5312.01)
SDA: P1.3 R22.1 U2.11 | length 1589.2
  Top Layer w10: P1.3@3546.45,4850.17 3549.24,4847.38 3580.53,4847.38 3582.73,4845.17 v1(3602.01,4845.17) ; R22.1@4141.81,3762.01 U2.11@4141.81,3837.52 ; R22.1@4142.01,3759.05 4144.97,3762.01 v1(4182.01,3762.01)
  Bottom Layer w10: v1(3602.01,4845.17) 4255.87,4191.31 4255.87,3784.2 4233.68,3762.01 v1(4182.01,3762.01)
SSPI_CS_N: U1.R1 U2.18 | length 1626.8
  Top Layer w10: U1.R1@4020.79,5422.29 3982.01,5383.51 3982.01,5257.01 v1(4092.01,5147.01) ; U2.18@4342.2,4057.01 v1(4402.01,4057.01)
  Bottom Layer w10: v1(4092.01,5147.01) 4092.01,4778.76 4137.01,4733.76 4137.01,4387.01 4310.94,4213.07 4310.94,4128.07 4382.01,4057.01 v1(4402.01,4057.01)
TCK: H1.1 pad.55@4741.91,6564.11 U1.T10 | length 1978.5
  Top Layer w3.94: U1.T10@4304.25,5390.79 4358.74,5336.3 v1(4358.74,5332.01) ; v1(4557.01,6187.01) 4557.01,6377.01 4742.01,6562.01 H1.1@4742.01,6637.01
  Bottom Layer w3.94: v1(4358.74,5332.01) 4355.02,5335.73 4355.02,5341.3 4359.75,5346.02 4359.75,5388.11 4360.19,5388.55 4360.19,5397.8 4363.9,5401.52 4363.9,5414.63 4360.19,5418.35 4360.19,5435.01 4333.67,5461.53 4333.67,5476.37 4292.58,5517.46 4281.44,5517.46 4277.5,5513.52 4261.49,5513.52 4250.13,5524.88 4079.13,5524.88 4060.71,5543.31 4060.71,5665.71 4077.68,5682.68 4092.36,5682.68 4105.27,5695.59 4154.45,5695.59 4168.43,5709.57 4173.29,5709.57 4218.29,5754.57 4243.71,5754.57 4314.13,5824.99 4314.13,5828.71 4553.29,6067.87 4553.29,6183.29 v1(4557.01,6187.01)
TDI: H1.3 pad.55@4991.99,6565.97 U1.R11 | length 3596.7
  Top Layer w3.94: U1.R11@4335.75,5422.29 4335.75,5420.41 v1(4348.08,5408.08) ; v1(4352.01,5067.01) 4352.01,5045.95 4355.94,5042.01 4360.45,5042.01 4365.45,5047.01 4378.56,5047.01 4383.56,5042.01 5550.94,5042.01 5740.94,5232.01 5740.94,5817.01 pad.55@4991.99,6565.97 4942.01,6615.95 H1.3@4942.01,6637.01
  Bottom Layer w3.94: v1(4348.08,5408.08) 4342.91,5402.91 4342.91,5076.1 v1(4352.01,5067.01)
TDO: H1.4 pad.55@4785.39,6562.47 U1.M10 | length 2123.4
  Top Layer w3.94: v1(4225.51,5782.61) 4226.68,5783.78 4320.24,5783.78 v1(4320.7,5783.31) ; v1(4287.01,5500.65) 4288.13,5500.65 U1.M10@4304.25,5516.77 ; v1(4597.01,6182.01) 4597.01,6215.87 4785.39,6404.26 pad.55@4785.39,6562.47 4785.39,6655.39 4842.01,6712.01 4967.01,6712.01 H1.4@5042.01,6637.01
  Bottom Layer w3.94: v1(4225.51,5782.61) 4220.51,5787.61 4211.48,5787.61 4177.83,5753.97 4177.83,5747.8 4176.77,5746.74 4176.77,5729.38 4152.53,5705.14 4085.14,5705.14 4052.35,5672.35 4052.35,5650.45 4050.42,5648.52 4050.42,5635.98 4052.83,5633.56 4052.83,5620.45 4047.01,5614.63 4047.01,5542.01 4072.01,5517.01 4241.25,5517.01 4252.61,5505.65 4282.01,5505.65 v1(4287.01,5500.65) ; v1@4322.01,5783.31 4322.01,5825.45 4597.01,6100.45 v1(4597.01,6182.01)
TMS: H1.2 pad.55@5036.18,6553.98 U1.T11 | length 3799.2
  Top Layer w3.94: U1.T11@4335.75,5390.79 4382.01,5344.53 v1(4382.01,5287.01) ; v1(4372.01,5031.18) 5562.32,5031.18 5764.88,5233.75 5764.88,5825.27 pad.55@5036.18,6553.98 4985.39,6604.76 4985.39,6678.62 4972.01,6692.01 4897.01,6692.01 H1.2@4842.01,6637.01
  Bottom Layer w3.94: v1(4372.01,5031.18) 4372.01,5277.01 v1(4382.01,5287.01)
TX: U1.K2 U2.37 | length 1715.7
  Top Layer w3.94: v1@3786.81,4467.01 U2.37@3786.81,4526.5 ; v1@3912.01,5607.01 3974.63,5607.01 3985.45,5596.18 4035.8,5596.18 ; 4035.84,5596.22 U1.K2@4052.29,5579.77
  Bottom Layer w3.94: v1(3786.81,4467.83) 3641.18,4467.83 3561.1,4547.91 3561.1,4978.2 3567.01,4984.1 3567.01,5317.01 3619.13,5369.13 3673.15,5369.13 3812.33,5508.31 3826.83,5508.31 3914.96,5596.44 v1(3914.96,5607.01)
VSYNC: P1.7 U1.P6 | length 898.7
  Top Layer w10: P1.7@3546.45,4928.91 v1(3602.01,4928.91) ; v1(4165.19,5438.83) 4178.27,5451.91 U1.P6@4178.27,5453.78
  Bottom Layer w3.94: v1(3602.01,4928.91) 3613.7,4928.91 3616.48,4926.13 3616.48,4919.79 3619.27,4917.01 3629.45,4917.01 3632.23,4919.79 3632.23,4926.13 3635.01,4928.91 3645.19,4928.91 3647.98,4926.13 3647.98,4919.79 3650.76,4917.01 3660.94,4917.01 3663.73,4919.79 3663.73,4926.13 3666.51,4928.91 3678.91,4928.91 4165.19,5415.19 v1(4165.19,5438.83)
Y2: P1.19 U1.P2 | length 905.8
  Top Layer w10: P1.19@3546.45,5165.1 v1(3602.01,5165.1) ; v1(4036.41,5471.28) 4052.29,5455.41 U1.P2@4052.29,5453.78
  Bottom Layer w3.94: v1(3602.01,5165.1) 3615.17,5165.1 3617.96,5167.89 3617.96,5173.06 3620.74,5175.85 3630.92,5175.85 3633.7,5173.06 3633.7,5167.89 3636.49,5165.1 3646.67,5165.1 3649.45,5167.89 3649.45,5181.27 3652.24,5184.05 3662.42,5184.05 3665.2,5181.27 3665.2,5167.89 3667.98,5165.1 3685.1,5165.1 3693.45,5173.45 3693.45,5177.39 3672.3,5198.55 3672.3,5202.48 3679.5,5209.68 3683.43,5209.68 3704.59,5188.53 3708.53,5188.53 3715.73,5195.73 3715.73,5199.66 3694.57,5220.82 3694.57,5224.76 3701.77,5231.95 3705.7,5231.95 3726.86,5210.8 3730.8,5210.8 3738,5218 3738,5221.93 3716.84,5243.09 3716.84,5247.03 3724.04,5254.23 3727.98,5254.23 3749.13,5233.07 3753.07,5233.07 3760.27,5240.27 3760.27,5244.2 3755.36,5249.11 3755.36,5253.05 3762.56,5260.25 3766.5,5260.25 3771.4,5255.34 3775.34,5255.34 3922.48,5402.48 3979.15,5402.48 4036.41,5459.74 v1(4036.41,5471.28)
Y3: P1.21 U1.P1 | length 905.5
  Top Layer w10: P1.21@3546.57,5204.57 3547.09,5205.09 v1(3602.53,5205.09) ; v1(3987.01,5455.04) 4019.53,5455.04 U1.P1@4020.79,5453.78
  Bottom Layer w3.94: v1(3602.53,5205.09) 3602.53,5210.09 3611.74,5219.31 3611.74,5223.25 3602.25,5232.74 3602.25,5236.68 3609.45,5243.88 3613.38,5243.88 3622.88,5234.38 3626.82,5234.38 3634.01,5241.58 3634.01,5245.52 3624.52,5255.01 3624.52,5258.95 3631.72,5266.15 3635.65,5266.15 3645.15,5256.65 3649.09,5256.65 3656.29,5263.85 3656.29,5267.79 3646.79,5277.28 3646.79,5281.22 3653.99,5288.42 3657.92,5288.42 3667.42,5278.92 3671.36,5278.92 3678.56,5286.12 3678.56,5290.06 3669.06,5299.56 3669.06,5303.49 3676.26,5310.69 3680.2,5310.69 3689.69,5301.19 3693.63,5301.19 3700.83,5308.39 3700.83,5312.33 3691.33,5321.83 3691.33,5325.76 3698.53,5332.96 3702.47,5332.96 3711.96,5323.47 3715.9,5323.47 3723.1,5330.66 3723.1,5334.6 3713.6,5344.1 3713.6,5348.03 3720.8,5355.23 3724.74,5355.23 3734.23,5345.74 3738.17,5345.74 3745.37,5352.93 3745.37,5356.87 3735.87,5366.37 3735.87,5370.31 3743.07,5377.5 3747.01,5377.5 3756.51,5368.01 3760.44,5368.01 3767.64,5375.21 3767.64,5379.14 3758.14,5388.64 3758.14,5392.58 3765.34,5399.78 3769.28,5399.78 3778.78,5390.28 3782.71,5390.28 3789.91,5397.48 3789.91,5401.41 3780.42,5410.91 3780.42,5414.85 3787.61,5422.05 3791.55,5422.05 3801.05,5412.55 3804.98,5412.55 3812.18,5419.75 3812.18,5423.69 3802.69,5433.18 3802.69,5437.12 3809.89,5444.32 3813.82,5444.32 3823.32,5434.82 3827.26,5434.82 3846.49,5454.06 3854.89,5454.06 3857.67,5456.84 3857.67,5459.22 3860.46,5462.01 3870.64,5462.01 3873.42,5459.22 3873.42,5456.84 3876.2,5454.06 3986.02,5454.06 v1(3987.01,5455.04)
Y4: P1.22 U1.N1 | length 902.7
  Top Layer w10: P1.22@3546.58,5224.25 v1(3587,5224.25) ; v1(3997.01,5487.01) 4019.06,5487.01 U1.N1@4020.79,5485.28
  Bottom Layer w3.94: v1(3587,5224.25) 3587,5234.25 3596.11,5243.36 3596.11,5247.3 3586.18,5257.24 3586.18,5261.18 3593.37,5268.37 3597.31,5268.37 3607.25,5258.44 3611.19,5258.44 3618.38,5265.64 3618.38,5269.57 3608.45,5279.51 3608.45,5283.45 3615.65,5290.65 3619.58,5290.65 3629.52,5280.71 3633.46,5280.71 3640.66,5287.91 3640.66,5291.84 3630.72,5301.78 3630.72,5305.72 3637.92,5312.92 3641.85,5312.92 3651.79,5302.98 3655.73,5302.98 3662.93,5310.18 3662.93,5314.11 3652.99,5324.05 3652.99,5327.99 3660.19,5335.19 3664.12,5335.19 3674.06,5325.25 3678,5325.25 3685.2,5332.45 3685.2,5336.39 3675.26,5346.32 3675.26,5350.26 3682.46,5357.46 3686.4,5357.46 3696.33,5347.52 3700.27,5347.52 3707.47,5354.72 3707.47,5358.66 3697.53,5368.59 3697.53,5372.53 3704.73,5379.73 3708.67,5379.73 3718.6,5369.79 3722.54,5369.79 3729.74,5376.99 3729.74,5380.93 3719.8,5390.87 3719.8,5394.8 3727,5402 3730.94,5402 3740.88,5392.06 3744.81,5392.06 3752.01,5399.26 3752.01,5403.2 3742.07,5413.14 3742.07,5417.07 3749.27,5424.27 3753.21,5424.27 3763.15,5414.33 3767.08,5414.33 3774.28,5421.53 3774.28,5425.47 3764.34,5435.41 3764.34,5439.34 3771.54,5446.54 3775.48,5446.54 3785.42,5436.61 3789.35,5436.61 3800.65,5447.9 3800.65,5451.84 3795.71,5456.78 3795.71,5460.71 3802.91,5467.91 3806.85,5467.91 3811.79,5462.98 3815.72,5462.98 3828.62,5475.87 3985.87,5475.87 v1(3997.01,5487.01)
Y5: P1.20 U1.N3 | length 907.4
  Top Layer w10: P1.20@3546.57,5184.87 v1(3587.01,5184.87) ; v1(4067.84,5467.84) 4067.84,5469.34 U1.N3@4083.78,5485.28
  Bottom Layer w3.94: v1(3587.01,5184.87) 3641.92,5184.87 3664.06,5207.01 3664.06,5210.95 3654.47,5220.54 3654.47,5224.47 3661.67,5231.67 3665.61,5231.67 3675.2,5222.09 3679.13,5222.09 3686.33,5229.29 3686.33,5233.22 3676.75,5242.81 3676.75,5246.75 3683.94,5253.94 3687.88,5253.94 3697.47,5244.36 3701.4,5244.36 3708.6,5251.56 3708.6,5255.49 3699.02,5265.08 3699.02,5269.02 3706.22,5276.22 3710.15,5276.22 3719.74,5266.63 3723.68,5266.63 3730.87,5273.83 3730.87,5277.76 3721.29,5287.35 3721.29,5291.29 3728.49,5298.49 3732.42,5298.49 3742.01,5288.9 3745.95,5288.9 3753.15,5296.1 3753.15,5300.04 3743.56,5309.62 3743.56,5313.56 3750.76,5320.76 3754.69,5320.76 3764.28,5311.17 3768.22,5311.17 3775.42,5318.37 3775.42,5322.31 3765.83,5331.89 3765.83,5335.83 3773.03,5343.03 3776.97,5343.03 3786.55,5333.44 3790.49,5333.44 3797.69,5340.64 3797.69,5344.58 3788.1,5354.16 3788.1,5358.1 3795.3,5365.3 3799.24,5365.3 3808.82,5355.71 3812.76,5355.71 3884.91,5427.86 3982.21,5427.86 4020.59,5466.24 4020.59,5477.84 4029.86,5487.11 4042.97,5487.11 4062.24,5467.84 v1(4067.84,5467.84)
Y6: P1.18 U1.N4 | length 876.3
  Top Layer w10: P1.18@3546.45,5145.42 v1(3587.01,5145.42) ; v1(4102.01,5472.01) U1.N4@4115.28,5485.28
  Bottom Layer w3.94: v1(3587.01,5145.42) 3608.65,5145.42 3611.43,5148.21 3611.43,5152.15 3614.22,5154.93 3624.4,5154.93 3627.18,5152.15 3627.18,5148.21 3629.97,5145.42 3640.15,5145.42 3642.93,5148.21 3642.93,5153.29 3645.71,5156.08 3655.89,5156.08 3658.68,5153.29 3658.68,5148.21 3661.46,5145.42 3671.64,5145.42 3674.43,5148.21 3674.43,5153.29 3677.21,5156.08 3687.39,5156.08 3690.17,5153.29 3690.17,5148.21 3692.96,5145.42 3700.42,5145.42 3710.19,5155.19 3710.19,5159.13 3703.01,5166.31 3703.01,5170.25 3710.21,5177.45 3714.15,5177.45 3721.33,5170.27 3725.27,5170.27 3732.46,5177.46 3732.46,5181.4 3725.28,5188.58 3725.28,5192.52 3732.48,5199.72 3736.42,5199.72 3743.6,5192.54 3747.54,5192.54 3754.74,5199.74 3754.74,5203.67 3747.56,5210.85 3747.56,5214.79 3754.75,5221.99 3758.69,5221.99 3765.87,5214.81 3769.81,5214.81 3777.01,5222.01 3777.01,5225.94 3769.83,5233.12 3769.83,5237.06 3777.03,5244.26 3780.96,5244.26 3788.14,5237.08 3792.08,5237.08 3799.28,5244.28 3799.28,5248.22 3792.1,5255.39 3792.1,5259.33 3799.3,5266.53 3803.23,5266.53 3810.41,5259.35 3814.35,5259.35 3930.05,5375.05 3999.48,5375.05 4096.44,5472.01 v1(4102.01,5472.01)
Y7: P1.16 U1.N5 | length 906.6
  Top Layer w10: P1.16@3546.48,5106.05 v1(3587.01,5106.05) ; v1(4132.01,5472.01) 4133.5,5472.01 U1.N5@4146.77,5485.28
  Bottom Layer w3.94: v1(3587.01,5106.05) 3606.75,5106.05 3609.53,5108.84 3609.53,5110.89 3612.31,5113.68 3622.49,5113.68 3625.28,5110.89 3625.28,5108.84 3628.06,5106.05 3638.24,5106.05 3641.03,5108.84 3641.03,5113.94 3643.81,5116.73 3653.99,5116.73 3656.77,5113.94 3656.77,5108.84 3659.56,5106.05 3669.74,5106.05 3672.52,5108.84 3672.52,5113.94 3675.31,5116.73 3685.49,5116.73 3688.27,5113.94 3688.27,5108.84 3691.05,5106.05 3701.23,5106.05 3704.02,5108.84 3704.02,5113.94 3706.8,5116.73 3716.98,5116.73 3719.77,5113.94 3719.77,5108.84 3722.55,5106.05 3743.29,5106.05 3749.94,5112.71 3749.94,5116.64 3740.26,5126.32 3740.26,5130.26 3747.46,5137.46 3751.4,5137.46 3761.08,5127.78 3765.02,5127.78 3772.21,5134.98 3772.21,5138.91 3762.53,5148.6 3762.53,5152.53 3769.73,5159.73 3773.67,5159.73 3783.35,5150.05 3787.29,5150.05 3794.49,5157.25 3794.49,5161.18 3784.8,5170.87 3784.8,5174.8 3792,5182 3795.94,5182 3805.62,5172.32 3809.56,5172.32 4093.42,5456.18 4108.56,5456.18 4124.39,5472.01 v1(4132.01,5472.01)
Y8: P1.14 U1.P4 | length 904.5
  Top Layer w10: P1.14@3546.45,5066.71 v1(3602.01,5066.71) ; v1(4097.65,5438.03) 4099.53,5438.03 U1.P4@4115.28,5453.78
  Bottom Layer w3.94: v1(3602.01,5066.71) 3615.38,5066.71 3618.17,5069.5 3618.17,5094.24 3620.95,5097.03 3631.13,5097.03 3633.91,5094.24 3633.91,5069.5 3636.7,5066.71 3646.88,5066.71 3649.66,5069.5 3649.66,5094.24 3652.45,5097.03 3662.63,5097.03 3665.41,5094.24 3665.41,5069.5 3668.19,5066.71 3678.37,5066.71 3681.16,5069.5 3681.16,5094.24 3683.94,5097.03 3694.12,5097.03 3696.91,5094.24 3696.91,5069.5 3699.69,5066.71 3726.33,5066.71 3735.65,5076.03 3741.21,5076.03 3749.57,5084.38 3749.57,5089.95 3757.92,5098.3 3763.49,5098.3 3771.84,5106.65 3771.84,5112.22 3780.19,5120.57 3785.76,5120.57 3794.11,5128.92 3794.11,5134.49 3802.46,5142.84 3808.03,5142.84 3816.38,5151.19 3816.38,5156.76 v1(4097.65,5438.03)
Y9: P1.12 U1.P5 | length 908.8
  Top Layer w10: P1.12@3546.45,5027.34 3601.67,5027.34 v1(3602.01,5027.01) ; v1@4131.09,5436.09 4131.09,5438.1 U1.P5@4146.77,5453.78
  Bottom Layer w3.94: v1(3602.01,5027.01) 3613.07,5027.01 3615.85,5024.22 3615.85,5004.79 3618.63,5002.01 3628.81,5002.01 3631.6,5004.79 3631.6,5024.22 3634.38,5027.01 3644.56,5027.01 3647.35,5024.22 3647.35,5004.79 3650.13,5002.01 3660.31,5002.01 3663.09,5004.79 3663.09,5024.22 3665.88,5027.01 3676.06,5027.01 3678.84,5024.22 3678.84,5004.79 3681.63,5002.01 3691.81,5002.01 3694.59,5004.79 3694.59,5024.22 3697.37,5027.01 3721.87,5027.01 v1(4131.02,5436.16)
pads on no net: P1.1 P1.23 P1.24 SCREW1.1 SCREW2.1 SCREW3.1 SCREW4.1 U1.A10 U1.A11 U1.A12 U1.A13 U1.A14 U1.A15 U1.B3 U1.B7 U1.B8 U1.B9 U1.B10 U1.B11 U1.B12 U1.B13 U1.B14 U1.B15 U1.B16 U1.C1 U1.C2 U1.C3 U1.C4 U1.C5 U1.C6 U1.C9 U1.C10 U1.C11 U1.C12 U1.C13 U1.C14 U1.C15 U1.C16 U1.D1 U1.D3 U1.D4 U1.D5 U1.D6 U1.D7 U1.D8 U1.D9 U1.D10 U1.D11 U1.D12 U1.D13 U1.E3 U1.E4 U1.E5 U1.E6 U1.E7 U1.E8 U1.E9 U1.E10 U1.E11 U1.E12 U1.E13 U1.E14 U1.F3 U1.F4 U1.F5 U1.F12 U1.F13 U1.F14 U1.G3 U1.G4 U1.G5 U1.G12 U1.G13 U1.G14 U1.H2 U1.H3 U1.H4 U1.H5 U1.H12 U1.H13 U1.H14 U1.J3 U1.J4 U1.J5 U1.J12 U1.J13 U1.K3 U1.K4 U1.K5 U1.K13 U1.K14 U1.K15 U1.L2 U1.L3 U1.L4 U1.L5 U1.L13 U1.L14 U1.L16 U1.M1 U1.M2 U1.M3 U1.M4 U1.M5 U1.M6 U1.M7 U1.M9 U1.M11 U1.M12 U1.M13 U1.N8 U1.N9 U1.N11 U1.N12 U1.N14 U1.N16 U1.P3 U1.P7 U1.P8 U1.P11 U1.P12 U1.P13 U1.P14 U1.P15 U1.R2 U1.R3 U1.R4 U1.R5 U1.R6 U1.R7 U1.R8 U1.R12 U1.R14 U1.T13 U2.4 U2.15 U2.16 U2.26 U2.28 U2.29 U2.30 U2.32 U2.33 U2.34 U2.35 U2.38 U2.39 U5.40 U8.4 USB1.A8 USB1.B6 USB1.B7 USB1.B8
copper on no net: | length 937.7
  Top Layer w3.94: 3677.01,4587.01 3686.81,4577.2 3686.81,4526.5 ; 3712.01,4572.01 3736.81,4547.2 3736.81,4526.5 ; 3786.81,3837.52 3795.82,3828.51 v1(3795.82,3773.2) ; 4136.81,4526.5 4136.81,4551.5 4197.32,4612.01 4222.01,4612.01 4232.01,4602.01 ; v1@4322.01,5442.01 4323.98,5442.01 4335.75,5453.78 ; 4337.2,3907.01 4377.01,3907.01 4397.01,3887.01 ; 4398.74,5863.23 4407.01,5871.5 v1(4407.01,5877.01) ; 4430.24,5863.23 4442.01,5875 v1(4442.01,5877.01) ; 4461.73,5831.73 v1(4477.01,5847.01) ; 4461.73,5863.23 4475.51,5877.01 v1(4477.01,5877.01) ; 4493.23,5831.73 4508.51,5847.01 v1@4512.01,5847.01
  Bottom Layer w3.94: v1(3795.82,3773.2) 3802.01,3767.01 3802.01,3697.01 ; v1(4322.05,5441.96) 4337.01,5427.01 4337.01,5422.01 ; v1(4407.01,5877.01) 4422.01,5892.01 4422.01,5912.01 4424.79,5914.79 4449.79,5914.79 4462.01,5927.01 ; v1(4442.01,5877.01) 4442.01,5892.01 ; v1(4477.01,5847.01) 4496.18,5866.18 4496.18,5888.56 4502.01,5894.39 4502.01,5932.01 ; v1(4477.01,5877.01) 4477.01,5897.01 ; v1(4509.7,5849.31) 4532.01,5871.62 4532.01,5927.01
  other v2: 3012.01,6118.82 3012.01,6150.31 3012.01,6181.81 3012.01,6213.31 3012.01,6244.8 3012.01,6276.3 3012.01,6307.8 3012.01,6339.29 3012.01,6370.79 3012.01,6402.28 3012.01,6433.78 3012.01,6465.28 3012.01,6496.77 3012.01,6528.27 3012.01,6559.76 3012.01,6595.2

## Polygon pours and split planes (outlines as drawn)
GND on Inner1 "GND_L02_P000" (none, pour order 0): 3325,6760 5865,6760 5865,2990 5825,2950 5820,2955 3210,2955 3210,6645
+3V3 on Inner2 "+3V3_L03_P001" (solid, pour order 1): 3247.5,6757.5 3260,6770 5910,6770 5910,2875 5900,2885 3180,2885

## Keep-outs
Board Outline Layer:
  lines w10: 3327.01,3000 5846.69,3000 5846.69,6727.01 3327.01,6727.01 3327.01,3000

## Other copper
Top Layer:
  region net TCK: 4732.01,6572.01 4752.01,6572.01 4752.01,6556.21 4731.8,6556.21 4732.01,6556.42
  region net TDO: 4775.5,6570.36 4795.5,6570.36 4795.5,6554.57 4775.29,6554.57 4775.5,6554.77
  region net TDI: 4982.09,6573.87 5002.09,6573.87 5002.09,6558.07 4981.88,6558.07 4982.09,6558.27
  region net TMS: 5026.28,6561.87 5046.28,6561.87 5046.28,6546.08 5026.07,6546.08 5026.28,6546.28
  region net +3V3: 5132.11,6564.91 5152.11,6564.91 5152.11,6549.11 5131.91,6549.11 5132.11,6549.31
  region net GND: 5232.11,6564.91 5252.11,6564.91 5252.11,6549.11 5231.91,6549.11 5232.11,6549.31
  region net GND: 3626.91,4607.59 3646.91,4607.59 3646.91,4591.8 3626.71,4591.8 3626.91,4592
  region net GND: 3540.56,4722.11 3540.56,4742.11 3556.35,4742.11 3556.35,4721.91 3556.15,4722.11
  region net +3V3: 3587.11,4874.91 3607.11,4874.91 3607.11,4859.11 3586.91,4859.11 3587.11,4859.31
  region net DN: 3622.11,3404.91 3642.11,3404.91 3642.11,3389.11 3621.91,3389.11 3622.11,3389.31
  region net DP: 3597.11,3424.91 3617.11,3424.91 3617.11,3409.11 3596.91,3409.11 3597.11,3409.31
  region net GND: 3702.11,3404.91 3722.11,3404.91 3722.11,3389.11 3701.91,3389.11 3702.11,3389.31
  region net GND: 3782.11,3229.91 3802.11,3229.91 3802.11,3214.11 3781.91,3214.11 3782.11,3214.31
  region net +5V: 3781.36,3265.65 3801.36,3265.65 3801.36,3249.86 3781.16,3249.86 3781.36,3250.06
  region net +1V8: 4850.16,3758.45 4870.16,3758.45 4870.16,3742.65 4849.95,3742.65 4850.16,3742.85
  region net GND: 4791.86,3678.52 4811.86,3678.52 4811.86,3662.72 4791.66,3662.72 4791.86,3662.92
  region net GND: 5583.85,3606.06 5603.85,3606.06 5603.85,3590.27 5583.65,3590.27 5583.85,3590.47
  region net +3V3: 3700.91,5780.74 3720.91,5780.74 3720.91,5764.95 3700.7,5764.95 3700.91,5765.15
  region net GND: 4447.11,6194.91 4467.11,6194.91 4467.11,6179.11 4446.91,6179.11 4447.11,6179.31
  region net +1V1: 5528.73,3607.6 5548.73,3607.6 5548.73,3591.81 5528.53,3591.81 5528.73,3592.01
  region: 3667.11,4594.91 3687.11,4594.91 3687.11,4579.11 3666.91,4579.11 3667.11,4579.31
  region: 3702.11,4579.91 3722.11,4579.91 3722.11,4564.11 3701.91,4564.11 3702.11,4564.31